# Altium PCB LL_project.PcbDoc
Units mil, origin at the board's own origin, x right, y up, seen from the top; angles counter-clockwise.
Board outline 3230 x 2460 mil, 2 copper layers (Top Layer, Bottom Layer); 62 components, 51 nets, 225 pads, 101 vias.
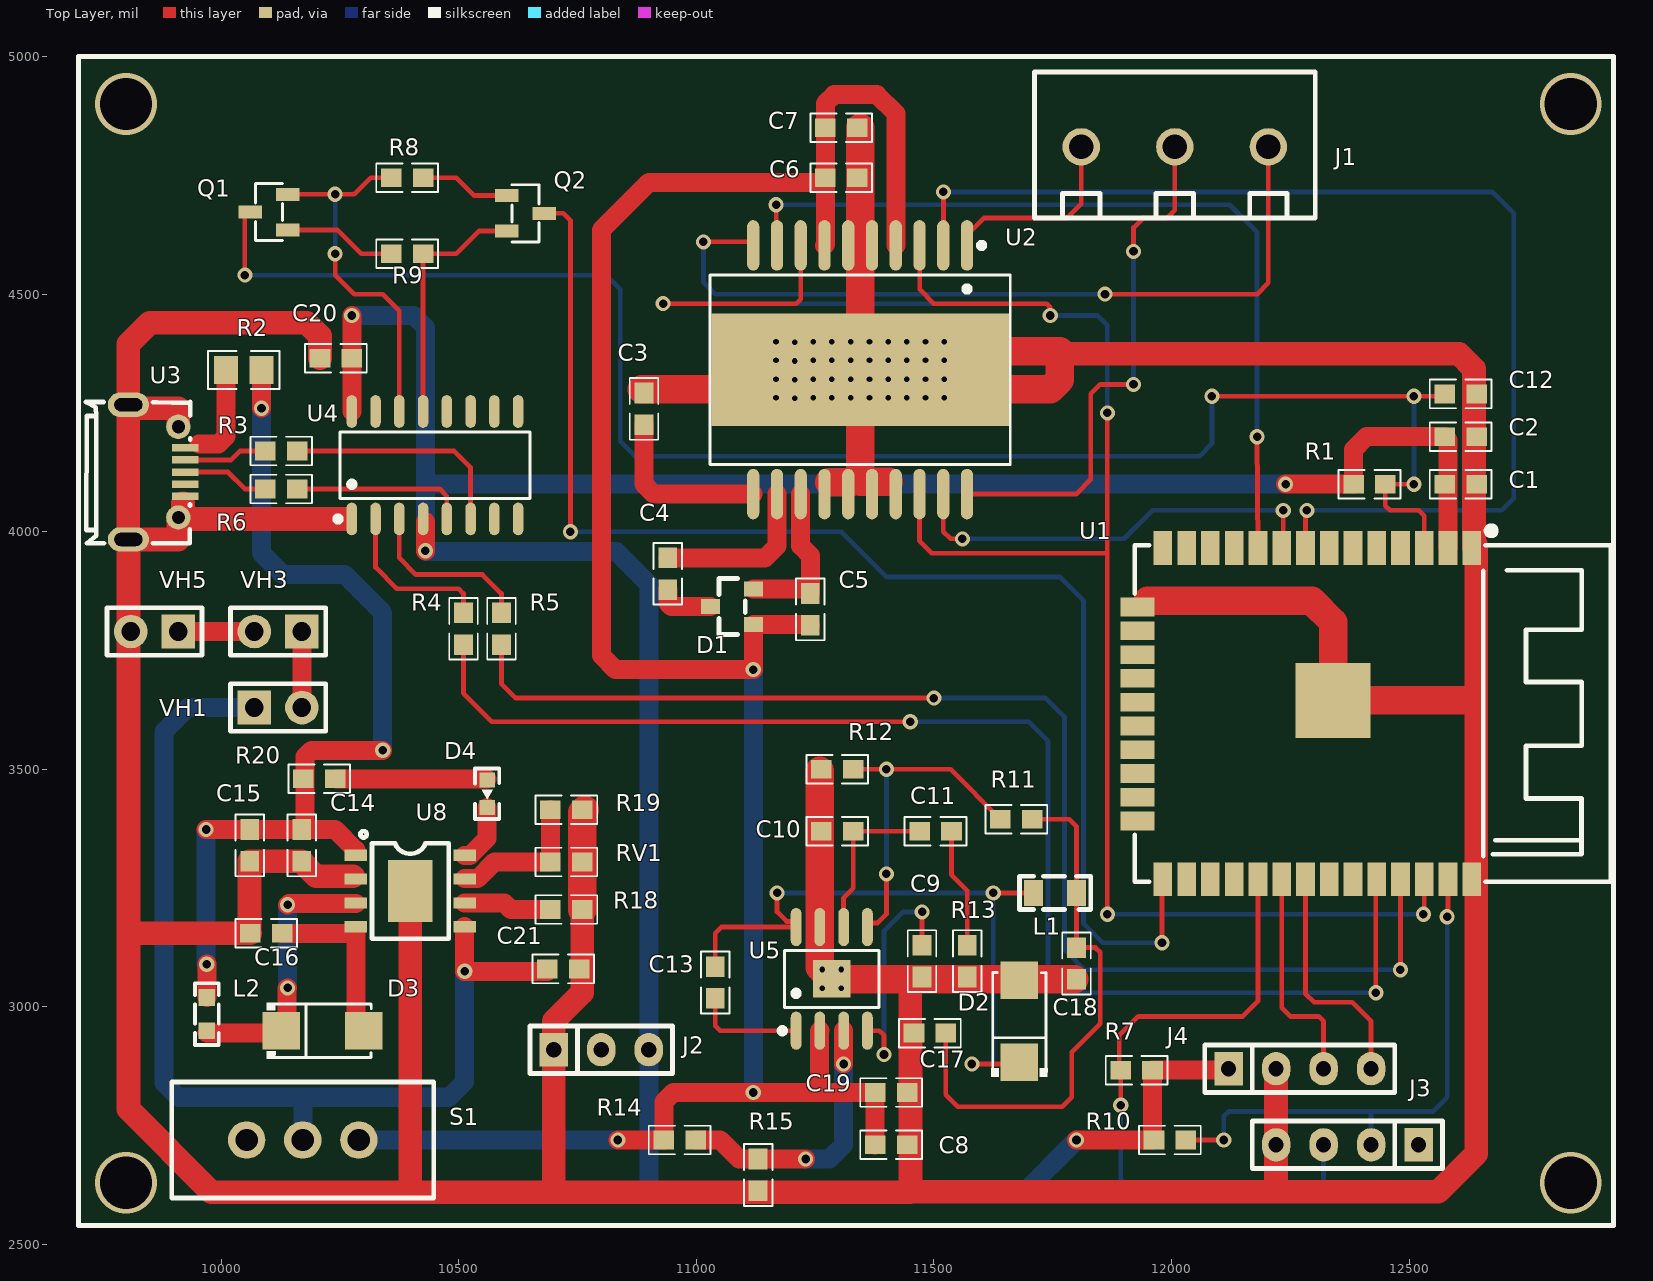
[diagram p0: Top Layer view]
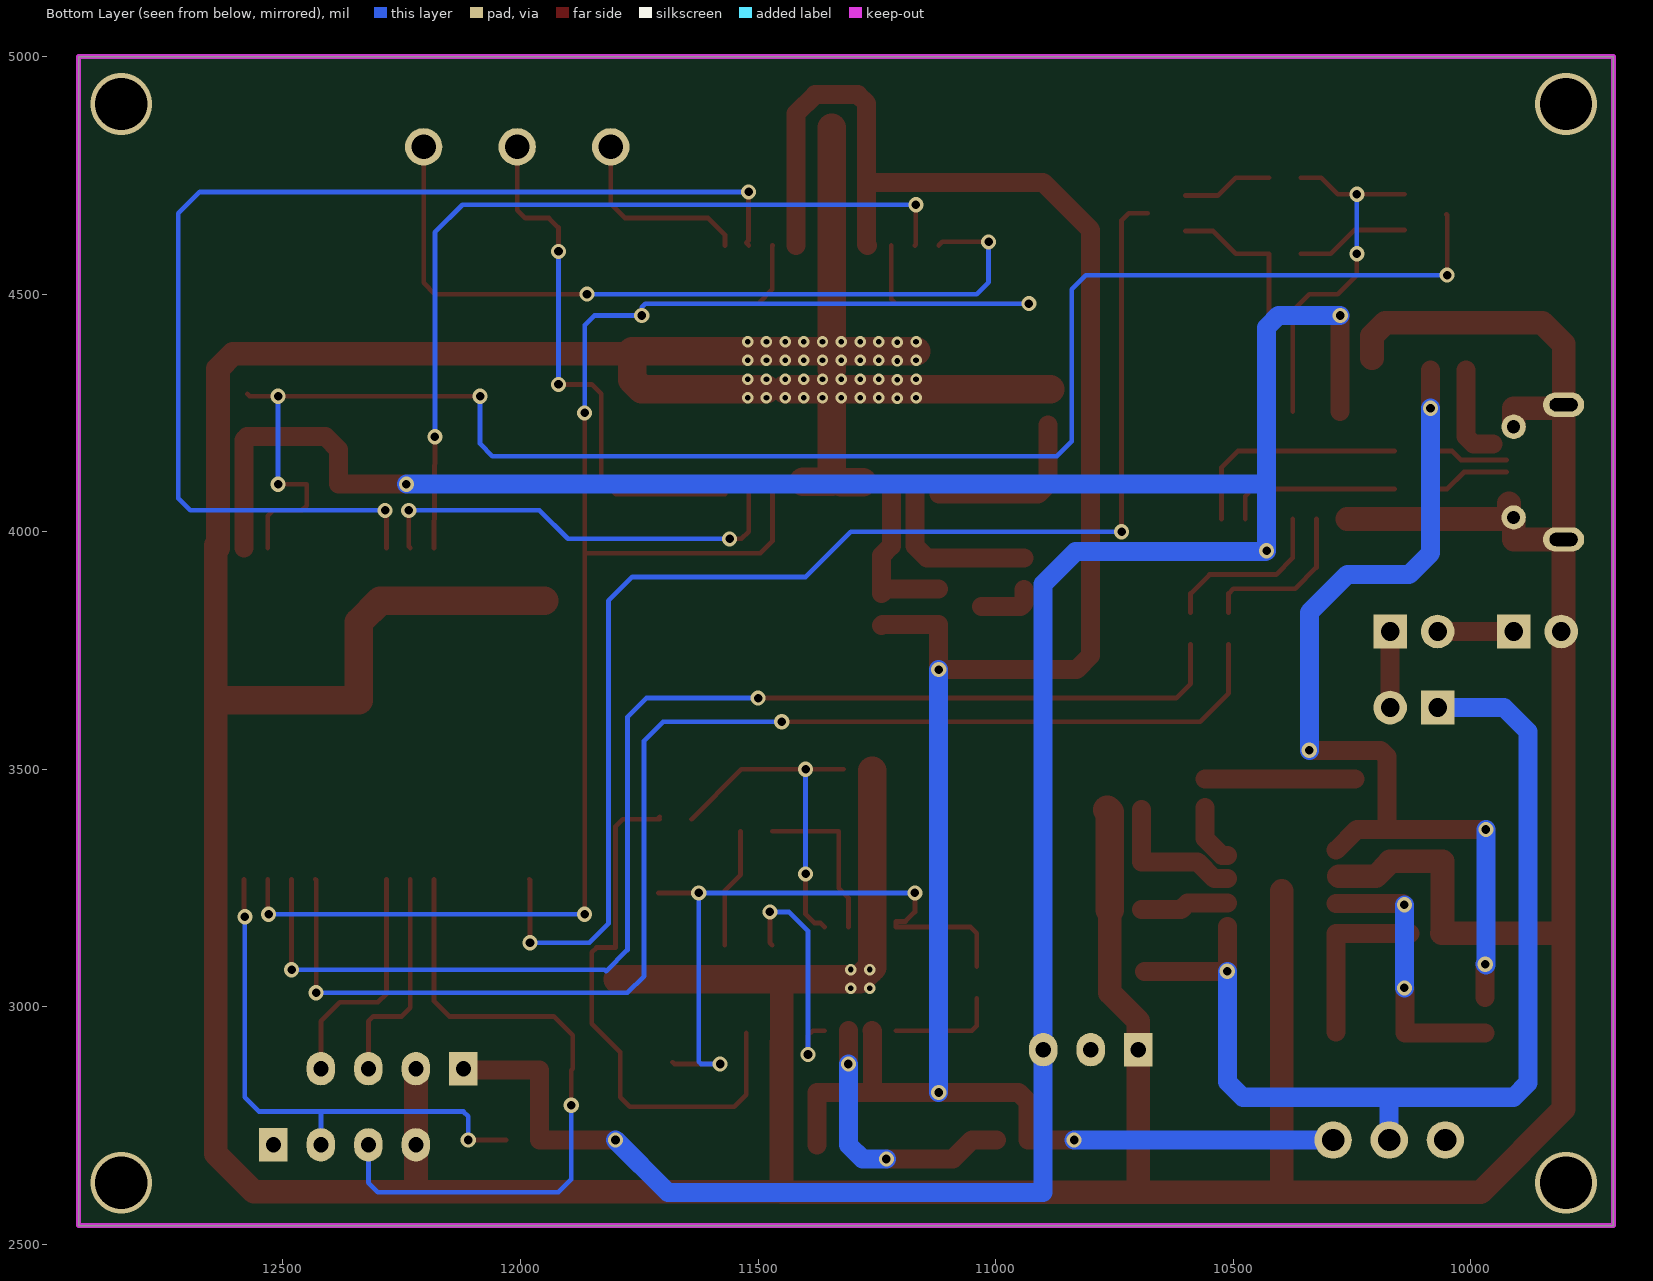
[diagram p1: Bottom Layer view, seen from below]

## Layer stack, top to bottom
Top Solder: solder mask 0.4, Solder Resist, Dk 3.5
Top Layer: signal copper 1.4
Dielectric 1: dielectric 12.6, FR-4, Dk 4.8
Bottom Layer: signal copper 1.4
Bottom Solder: solder mask 0.4, Solder Resist, Dk 3.5

## Board outline
9700,2540 9700,5000 12930,5000 12930,2540

## Design rules (kind name [scope] priority, off if disabled: settings)
AcuteAngle [All] p1: minimum=9.00000000000000E+0001 checktracksonly=FALSE
Clearance [All] p1: gap=6 ignorepadtopadclearanceinfootprint=FALSE
HoleSize [All] p1: absolutevalues=TRUE maxlimit=200 minlimit=1 maxpercent=80.000 minpercent=20.000
PolygonConnect [All] p1: connectstyle=Relief reliefconductorwidth=10 reliefentries=4 polygonreliefangle="90 Angle" airgapwidth=10
RoutingVias [All] p1: holewidth=28 width=50 viastyle="Through Hole" minholewidth=18 minwidth=30 maxholewidth=28 maxwidth=50
SilkToSilkClearance [All] p1: silktosilkclearance=6
SolderMaskExpansion [All] p1: expansion=4
Width [All] p1: maxlimit=100 minlimit=6 preferedwidth=10
28 further rules are at their usual default settings.

## Components (designator, comment, footprint, x,y, rotation, side; value= is the part's Value field where it differs from the comment)
C1 "Cap Semi" 0603-1 12608.46,4100 r0 top value=0.1uF
C2 "Cap Semi" 0603-1 12608.46,4200 r0 top value=0.1uF
C3 "Cap Semi" 0603-1 10890,4258.46 r270 top value=220nF
C4 "Cap Semi" 0603-1 10940,3911.54 r90 top value=10nF
C5 "Cap Semi" 0603-1 11240,3836.54 r90 top value=1uF
C6 "Cap Semi" 0603-1 11305,4745 r0 top value=100uF
C7 "Cap Semi" 0603-1 11305,4850 r0 top value=100nF
C8 "CAP" 0603-1 11410,2710 r0 top
C9 "CAP" 0603-1 11475,3096.54 r90 top
C10 "CAP" 0603-1 11296.54,3370 r0 top
C11 "CAP" 0603-1 11503.46,3370 r180 top
C12 "Cap Semi" 0603-1 12608.46,4290 r180 top value=0.1uF
C13 "Cap Semi" 0603-1 11040,3051.54 r90 top value=100pF
C14 "Cap Semi" 0603-1 10170,3340 r90 top value=1uF
C15 "Cap Semi" 0603-1 10060,3340 r90 top value=10uF
C16 "Cap Semi" 0603-1 10095,3155 r0 top value=22uF
C17 "CAP" 0603-1 11491.54,2945 r0 top
C18 "CAP" 0603-1 11800,3091.54 r90 top
C19 "Cap Semi" 0603-1 11410,2820 r0 top value=10nF
C20 "Cap Semi" 0603-1 10241.54,4365 r180 top value=0.1u
C21 "Cap Semi" 0603-1 10720,3080 r180 top value=100uF
D1 "LBAT54SLT1G" schottky 11075.28,3842.6 r0 top
D2 "SS36_C16015" SMA_L4.3-W2.6-LS5.2-RD 11680,2970 r90 top
D3 "SS34_C3032484" SMA_L4.3-W2.6-LS5.2-RD 10213.39,2950 r0 top
D4 "LED2" LED_0603_R 10560,3448.74 r90 top
J1 "WJ126V-5.0-3P" CONN-TH_3P-P5.00_WJ126V-5.0-3P 12006.9,4810 r180 top
J2 "Pin HDR1X3" "Pin HDR1X3/2.54mm-S" 10700,2910 r90 top
J3 "Pin HDR1X4" "Pin HDR1X4/2.54mm-S" 12520,2710 r270 top
J4 "Pin HDR1X4" "Pin HDR1X4/2.54mm-S" 12120,2870 r90 top
L1 "Inductor" 0805L 11705,3240 r0 top value=6.8uH
L2 "INDUCTOR" 0603L 9970,3020 r270 top
Q1 "S8050" Q1 9486.65,4957.51 r0 top
Q2 "S8050" Q1 11254.61,4385.09 r180 top
R1 "Res1" 0603-1 12416.54,4100 r180 top value=10K
R2 "Res3" 0805-1 10047.6,4340 r180 top value=12K
R3 "Res3" 0603-1 10126.54,4170 r180 top value=22R
R4 "Res3" 0603-1 10510,3795.94 r90 top value=100R
R5 "Res3" 0603-1 10590,3795.94 r90 top value=100R
R6 "Res3" 0603-1 10126.54,4090 r180 top value=22R
R7 "RES" 0603-1 11926.54,2866.93 r0 top
R8 "Res3" 0603-1 10391.54,4745 r180 top value=10K
R9 "Res3" 0603-1 10391.54,4585 r0 top value=10K
R10 "RES" 0603-1 11996.54,2720 r180 top
R11 "RES" 0603-1 11673.46,3395 r0 top
R12 "RES" 0603-1 11296.54,3500 r0 top
R13 "RES" 0603-1 11570,3096.54 r90 top
R14 "RES" 0603-1 10965,2720 r0 top
R15 "RES" 0603-1 11130,2646.54 r270 top
R18 "RES" 0603-1 10726.54,3205 r180 top
R19 "RES" 0603-1 10726.54,3415 r180 top
R20 "RES" 0603-1 10206.54,3480 r180 top
RV1 "Varistor" 0603-1 10726.54,3305 r0 top
S1 "SS-12D10" SS-12D10 10290,2720 r180 top
U1 "ESP-WROOM-32" ESP32 12818.14,3809.95 r270 top
U2 "L6234PD013TR" L6234 11355,4311.2 r180 top
U3 "MICRO USB" MICRO-USB-SMD_MICROXNJ 9864.78,4125.47 r270 top
U4 "CH340C" SOP-16_L10.0-W3.9-P1.27-LS6.0-BL 10450,4140 r0 top
U5 "TPS54331DDAR" SOIC-8_L5.0-W4.0-P1.27-LS6.0-BL-EP2.0 11285,3059 r0 top
U8 "CS5095" cs5095 10390,3230 r270 top
VH1 "VH2" VH 10120,3630 r0 top
VH3 "VH4" VH 10120,3790 r180 top
VH5 "VH6" VH 9860,3790 r180 top

## Footprints (in the part's own frame and the unit in brackets; to place one, negate y for a bottom-side part, rotate by r counter-clockwise, add the part's x,y. Pads: shape width x height; smd on the part's side, far side on the other; paste and mask are expansions set on the pad)
0603-1 [mm] "贴片带丝印"
  rect 1.1x1 smd: 1(-0.85,0) 2(0.85,0)
  silkscreen extent -1.65,-0.76 1.65,0.76, body extent -1.14,-0.38 1.14,0.38, height 1
0603L [mil] "小功率贴片电感"
  rect 35x35 smd: 1(0,0) 2(70,0)
  silkscreen extent -30,-25 100,25, body extent 4,-16 66,15, height 31
0805-1 [mm] "贴片带丝印"
  rect 1.3x1.5 smd: 1(-0.95,0) 2(0.95,0)
  silkscreen extent -1.91,-1.02 1.91,1.02, body extent -1.14,-0.51 1.14,0.51, height 1
0805L [mil] "小功率贴片电感"
  rect 40x55 smd: 1(5,0) 2(95,0)
  silkscreen extent -25,-35 125,35, body extent 15,-24 94,24, height 35
CONN-TH_3P-P5.00_WJ126V-5.0-3P [mil]
  round 78.7 hole 51.2 mask+2: 1(196.9,0) 2(0,0) 3(-196.8,0)
  silkscreen extent -295,-158 295,150
cs5095 [mm]
  rect 0.6x1.2 smd mask+0.051: 1(-2.261,-2.702) 2(-0.991,-2.702) 3(0.279,-2.702) 4(1.549,-2.702) 5(1.549,3.115) 6(0.279,3.115) 7(-0.991,3.115) 8(-2.261,3.115)
  rect 3.3x2.4 smd mask+0.051: 9(-0.356,0.206)
  silkscreen extent -3.56,-2.46 2.19,2.26
ESP32 [mm]
  rect 1.8x1.001 smd mask+0.051: 1(-3.961,-4.734) 2(-3.961,-6.004) 3(-3.961,-7.274) 4(-3.961,-8.544) 5(-3.961,-9.814) 6(-3.961,-11.084) 7(-3.961,-12.354) 8(-3.961,-13.624) 9(-3.961,-14.894) 10(-3.961,-16.164) 11(-3.961,-17.434) 12(-3.961,-18.704) 13(-3.961,-19.974) 14(-3.961,-21.244) 25(13.741,-21.244) 26(13.741,-19.974) 27(13.741,-18.704) 28(13.741,-17.434) 29(13.741,-16.164) 30(13.741,-14.894) 31(13.741,-13.624) 32(13.741,-12.354) 33(13.741,-11.084) 34(13.741,-9.814) 35(13.741,-8.544) 36(13.741,-7.274) 37(13.741,-6.004) 38(13.741,-4.734)
  rect 1.001x1.8 smd mask+0.051: 15(-0.8,-22.595) 16(0.47,-22.595) 17(1.74,-22.595) 18(3.01,-22.595) 19(4.28,-22.595) 20(5.55,-22.595) 21(6.82,-22.595) 22(8.09,-22.595) 23(9.36,-22.595) 24(10.63,-22.595)
  rect 4x4 smd mask+0.051: 39(4.19,-12.145)
  silkscreen extent -5.08,-22.74 13.88,2.76
L6234 [mil]
  oval 25.6x106.1 smd mask+2: 1(-214.7,-291.4) 2(-164.7,-291.4) 3(-114.7,-291.4) 4(-64.7,-291.4) 5(-14.7,-291.4) 6(35.3,-291.4) 7(85.3,-291.4) 8(135.3,-291.4) 9(185.3,-291.4) 10(235.3,-291.4) 11(235.3,232) 12(185.3,232) 13(135.3,232) 14(85.3,232) 15(35.3,232) 16(-14.7,232) 17(-64.7,232) 18(-114.7,232) 19(-164.7,232) 20(-214.7,232)
  rect 626x236.2 smd mask+2: 21(10.3,-29.7)
  silkscreen extent -306,-297 326,170
LED_0603_R [mm]
  rect 0.8x0.85 smd: 1(0.73,0) 2(-0.73,0)
  silkscreen extent -1.35,-0.65 1.35,0.65, body extent -0.81,-0.4 0.81,0.4, height 0.6
MICRO-USB-SMD_MICROXNJ [mm]
  rect 0.4x1.4 smd mask+0.051: 1(-1.3,1.521) 2(-0.65,1.521) 3(0,1.521) 4(0.65,1.521) 5(1.3,1.521)
  round 1.3 hole 0.7 mask+0.051: 6(2.425,1.149) 9(-2.425,1.149)
  oval 1.3x2.2 hole 0.7 slot 1.5 at 90 deg mask+0.051: 7(3.6,-1.521) 8(-3.6,-1.521)
  silkscreen extent -3.76,-3.78 3.8,1.79
"Pin HDR1X3/2.54mm-S" [mil]
  rect 70x60 hole 32: 1(0,0)
  oval 70x60 hole 32: 2(0,-100) 3(0,-200)
  silkscreen extent -50,-250 50,50, body extent -50,-250 50,50, height 336
"Pin HDR1X4/2.54mm-S" [mil]
  rect 70x60 hole 32: 1(0,0)
  oval 70x60 hole 32: 2(0,-100) 3(0,-200) 4(0,-300)
  silkscreen extent -50,-350 50,50, body extent -50,-350 50,50, height 336
Q1 [mm]
  rect 1.25x0.7 smd mask+0.051: 1(16.595,-8.187) 2(16.595,-6.287) 3(14.595,-7.237)
  silkscreen extent 14.87,-8.76 16.32,-5.71
schottky [mm]
  rect 1x0.8 smd mask+0.051: 1(1.15,-0.95) 2(1.15,0.95) 3(-1.15,0)
  silkscreen extent -0.7,-1.5 0.7,1.5
SMA_L4.3-W2.6-LS5.2-RD [mm]
  rect 2x2 smd mask+0.051: 1(-2.2,0) 2(2.2,0)
  silkscreen extent -2.98,-1.5 2.6,1.5
SOIC-8_L5.0-W4.0-P1.27-LS6.0-BL-EP2.0 [mil]
  oval 22.6x80.2 smd mask+2: 1(-75,-109) 2(-25,-109) 3(25,-109) 4(75,-109) 5(75,109) 6(25,109) 7(-25,109) 8(-75,109)
  rect 78.7x78.7 smd mask+2: 9(0,0)
  silkscreen extent -110,-115 100,60
SOP-16_L10.0-W3.9-P1.27-LS6.0-BL [mm]
  oval 0.56x1.745 smd mask+0.051: 1(-4.445,-2.872) 2(-3.175,-2.872) 3(-1.905,-2.872) 4(-0.635,-2.872) 5(0.635,-2.872) 6(1.905,-2.872) 7(3.175,-2.872) 8(4.445,-2.872) 9(4.445,2.872) 10(3.175,2.872) 11(1.905,2.872) 12(0.635,2.872) 13(-0.635,2.872) 14(-1.905,2.872) 15(-3.175,2.872) 16(-4.445,2.872)
  silkscreen extent -5.33,-3.02 5.08,1.77
SS-12D10 [mm]
  round 2 hole 1.2: 1(0,0) 2(3,0) 3(6,0)
  silkscreen extent -4,-3.1 10,3.1, body extent -3.95,-3.15 10.05,3.05, height 9.65
VH [mm]
  rect 1.8x1.8 hole 1 mask+0.051: 1(-1.27,0)
  round 1.8 hole 1 mask+0.051: 2(1.27,0)
  silkscreen extent -2.54,-1.27 2.54,1.27

## Part data
C1 C2 C3 C4 C5 C6 C7 C12 C13 C14 C15 C16 C19 C20 C21: "Capacitor (Semiconductor SIM Model)", LatestRevisionDate=29-May-2009, LatestRevisionNote="IPC-7351 Footprint Added.", PackageDescription="Chip Capacitor", PackageReference=C1206, Published=8-Jun-2000, Publisher="Altium Limited"
C8 C9 C10 C11 C17 C18: "无极性电容"
  C8 C18: =47uF
  C9: =10nF
  C10: =47pF
  C11: =1000pF
  C17: =47upF
D1: Average Rectified Current (Io)=200mA, Forward Voltage (Vf@If)=320mV@1mA, JLCPCB Part Class="Extended Part", LCSC Part Name="30V 200mA 320mV@1mA", Manufacturer=LRC(乐山无线电), Reverse Voltage (Vr)=30V, Add into BOM=yes, Convert to PCB=yes, Datasheet=https://atta.szlcsc.com/upload/public/pdf/source/20130604/1457706606553.pdf, Device=LBAT54SLT1G, Manufacturer Part=LBAT54SLT1G, Name=LBAT54SLT1G, Supplier=LCSC, Supplier Footprint=SOT-23(SOT-23-3), Supplier Part=C12765, Symbol=LBAT54SLT1G
D2: Average Rectified Current (Io)=3A, Forward Voltage (Vf@If)=700mV@3A, JLCPCB Part Class="Extended Part", LCSC Part Name="60V 3A 700mV@3A", Manufacturer=MDD, Manufacturer Part=SS36, Reverse Voltage (Vr)=60V, Add into BOM=yes, Convert to PCB=yes, Datasheet=https://atta.szlcsc.com/upload/public/pdf/source/20210506/C15874_5BDBC70F665BA444FCE0210303DB2A89.pdf, Device=SS36_C16015, Name=SS36, Supplier=LCSC, Supplier Footprint=SMA(DO-214AC), Supplier Part=C16015, Symbol=SS36
D3: JLCPCB Part Class="Extended Part", LCSC Part Name=SS34, Manufacturer=TDD(台冠电子), Add into BOM=yes, Convert to PCB=yes, Datasheet=https://atta.szlcsc.com/upload/public/pdf/source/20220622/9D70D0693761B542BF6F533590093AA5.pdf, Device=SS34_C3032484, Manufacturer Part=SS34, Name=SS34, Supplier=LCSC, Supplier Footprint=SMA, Supplier Part=C3032484, Symbol=SS34_C3032484
D4: "Typical RED, GREEN, YELLOW, AMBER GaAs LED", LatestRevisionDate=17-Jul-2002, LatestRevisionNote="Re-released for DXP Platform.", PackageDescription="SM LED; 2 Flat Leads", PackageReference=3.2X1.6X1.1, PackageVersion=Feb-2002, Published=8-Jun-2000, Publisher="Altium Limited"
J1: Color=绿色, Current Rating (Max)=18A, JLCPCB Part Class="Extended Part", LCSC Part Name="5mm 排数:1 每排P数:3 直针 可拼接", Manufacturer=KANGNEX(康奈克斯电气), Operating Temperature Range=-40℃~+105℃, Voltage Rating (Max)=250V, Add into BOM=yes, Convert to PCB=yes, Datasheet=https://atta.szlcsc.com/upload/public/pdf/source/20191225/C8401_BC4AEF85CCBF7CDF5CCE64583ADD1E63.pdf, Device=WJ126V-5.0-3P, Manufacturer Part=WJ126V-5.0-3P, Mounting Sytle=直针, Name=WJ126V-5.0-3P, Number of PINs Per Row=3, Number of Rows=1, Pitch=5mm, Supplier=LCSC, Supplier Footprint=P=5mm, Supplier Part=C8401, Symbol=WJ126V-5.0-3P, Wire Gauge - AWG=14~26, Wire Gauge - mm?=2.5
Q1 Q2: JLCPCB Part Class="Extended Part", Manufacturer=Doeshare(德芯), Add into BOM=yes, Convert to PCB=yes, Datasheet=https://atta.szlcsc.com/upload/public/pdf/source/20220117/E6D3315E0D6ADDB25840BFFAC039C5C0.pdf, Device=S8050, LCSC Part Name=S8050, Manufacturer Part=S8050, Name=S8050, Supplier=LCSC, Supplier Footprint=SOT-23, Supplier Part=C2931719, Symbol=S8050_C2931719
R1 R2 R3 R4 R5 R6 R8 R9: "Resistor", Published=8-Jun-2000, Publisher="Altium Limited"
  R1: LatestRevisionDate=17-Jul-2002, LatestRevisionNote="Re-released for DXP Platform.", PackageDescription="Axial Device, Thru-Hole; 2 Leads; 0.3 in Pin Spacing", PackageReference=AXIAL-0.3
  R2 R3 R4 R5 R6 R8 R9: LatestRevisionDate=29-May-2009, LatestRevisionNote="IPC-7351 Footprint Added.", PackageDescription="Chip Resistor", PackageReference=J1-0603
RV1: "压敏电阻", =100K
VH3 VH5: library part VH2
L1: Code_IEC=1005, Code_JEITA=0402, LatestRevisionDate=29-May-2009, LatestRevisionNote="IPC-7351 Footprint Added.", PackageDescription="Chip Inductor", PackageReference=0402-A, Published=8-Jun-2000, Publisher="Altium Limited"
L2: =2.2uH
R7 R10: =5K
R11: =10.2K
R12: =3.24K
R13: =24.9K
R14: =332K
R15: =68.1K
R18: =10K
R19: =82K
R20: =1K

## Via types
v1: diameter 32, hole 18, Top Layer to Bottom Layer, tented both sides, 52 vias
v2: diameter 24, hole 12, Top Layer to Bottom Layer, tented both sides, 44 vias
v3: diameter 130, hole 110, Top Layer to Bottom Layer, 4 vias
v4: diameter 32, hole 18, Top Layer to Bottom Layer, 1 vias

## Nets (pads, with @x,y where several pads share a name; then routed paths per layer and width w, separated by ;. In a path a pad name is that pad's centre, name@x,y a point inside that pad or via, vN(x,y) a via of type N, cw(c..) or ccw(c..) an arc to the next point about the centre after c; other vN are vias at no path point)
5VIN: C14.2 C15.2 L2.1 R2.1 R20.2 U8.1 | length 1987.7
  Top Layer w40: v1(9968.46,3373.46) C15.2 C14.2 10240.17,3373.46 U8.1@10283.62,3330.01 ; L2.1 v1(9970,3090) ; v1(10085,4260) R2.1 ; C14.2@10176.54,3380 10176.54,3526.54 10190,3540 v1(10340,3540)
  Bottom Layer w40: v1(9968.46,3373.46) 9968.46,3088.46 v1(9970,3090) ; v1(10085,4260) 10085,3955 10130,3910 10260,3910 10340,3830 v1(10340,3540)
+3.3V: C1.1 C2.1 C20.1 J2.3 J4.1 R1.2 R7.2 R10.2 U1.2 U4.4 U4.16 | length 6558.1
  Top Layer w40: U4.16 C20.1 v1(10275,4455) ; v1(10430,3960) U4.4@10430,4021.91 ; v1(11800,2720) 11960,2720 R7.2 12116.93,2866.93 J4.1 ; v1(12240,4100) R1.2 12383.07,4173.07 12410,4200 C2.1 12581.76,4193.24 U1.2
  Bottom Layer w40: v1(10275,4455) 10405,4455 10430,4430 10430,4100 ; v1(11800,2720) 11690,2610 10900,2610 J2.3 10900,3890 10832,3958 10432,3958 v1(10430,3960) 10430,4100 ; v1(12240,4100) 10430,4100
BatVin: C5.1 C6.1 C7.1 C8.1 C19.1 D1.1 R14.1 S1.1 U2.4 U2.7 U5.2 | length 5015.6
  Top Layer w40: v1(10835,2720) R14.1 10931.54,2800 10951.54,2820 v1(11120,2820) 11260,2820 ; C5.1 11237.87,3805.2 D1.1 11120,3804.64 v1(11120,3710) 10830,3710 10800,3740 10800,4635 10900,4735 11261.54,4735 C6.1 ; U5.2 11259,2949 11259,2821 11260,2820 ; U2.7 11271.54,4604.44 C6.1 ; C8.1 C19.1 11260,2820 ; U2.4 11419.7,4880.3 11380,4920 11290,4920 11271.54,4901.54 C7.1 C6.1
  Bottom Layer w40: S1.1 v1(10835,2720) ; v1(11120,2820) v1(11120,3710)
D+: R6.1 U4.5 | length 369.3
  Top Layer w10: R6.1 10460,4090 10475,4075 U4.5
D-: R3.1 U4.6 | length 487.6
  Top Layer w10: R3.1 10490,4170 10525,4135 U4.6
DTR: Q2.2 R9.2 U4.13 | length 527.9
  Top Layer w10: U4.13 R9.2 10495,4585 10542.6,4632.6 Q2.2
EN: C12.2 Q1.3 R1.1 U1.3 | length 3559.4
  Top Layer w10: v1(10050,4540) 10050,4666.34 Q1.3@10051.26,4667.6 ; v1(12085,4285) v1(12510,4285) 12570,4285 C12.2 ; v1(12510,4100) R1.1 12450,4055 12460,4045 12520,4045 12531.76,4033.24 U1.3
  Bottom Layer w10: v1(10050,4540) 10810,4540 10840,4510 10840,4190 10871,4159 12059,4159 12085,4185 v1(12085,4285) ; v1(12510,4100) v1(12510,4285)
GND: C1.2 C2.2 C3.1 C6.2 C7.2 C8.2 C9.1 C10.1 C12.1 C14.1 C15.1 C16.1 C17.1 C18.1 C19.2 C20.2 C21.1 D2.2 J2.1 J3.4 J4.2 R12.1 R13.1 R15.2 R18.1 R19.1 RV1.2 U1.1 U1.15 U1.38 U1.39 U2.5 U2.6 U2.14 U2.15 U2.16 U2.17 U2.21 U3.5 U3.6 U3.7 U3.8 U3.9 U4.1 U5.7 U5.9 U8.2 U8.9 VH5.2 | length 15096.2
  Top Layer w50: U3.8 9804.88,4394.88 9850,4440 10180,4440 10208.07,4411.93 C20.2 ; U3.6 9920,4040 9920,4060 ; U3.9 9910,4260 9804.88,4260 U3.7 ; U3.6@9910.87,4027.18 9910,4027.18 U3.6@9910,4026.91 ; C16.1 C16.1@10060,3155 ; C14.1@10170,3305 10200,3275 U8.2@10277.63,3275 ; C14.1 C15.1 C16.1@10060,3155 ; 10260,4026.91 U3.6@9910,4026.91 ; 10398.12,2618.12 U8.9 ; R18.1 10760,3030 10700,2970 J2.1 10700,2610 ; 11450,2610 10700,2610 ; C17.1@11450,2926.27 11450,3030 ; 11451,2925.27 11451,2820 11451,2611 12220,2611 ; 11765,4374.56 12605,4374.56 12636.76,4342.81 12636.76,4100 U1.1@12636.76,3965.88 ; J4.2 J3.4 12220,2611 ; U1.1@12637.46,3975 12641,3971.46 12641,2691 12561,2611 12220,2611 ; 9804.88,3160 U3.7 ; 9804.88,3160 9804.88,2785.12 9980,2610 10700,2610 ; 9804.88,3160 9809.88,3155 C16.1@10060,3155 ; U3.7 9910,3983.74 U3.6@9910,4026.91
  Top Layer w60: R18.1 10760,3410 R19.1@10765,3415 ; C3.1@10885,4300 11325,4300 11344.7,4300 11344.7,4105.3 11404.7,4105.3 ; U2.21@11167.5,4380 11246.3,4380 U2.21@11325,4380 ; R12.1@11260,3496.93 U5.7 11260,3084 v2(11265.3,3078.7) U5.9 11285.93,3058.07 11475,3058.07 C18.1@11795,3058.07 ; U2.14@11280,4104.2 U2.15@11324.7,4104.2 ; U2.21 C7.2@11344.7,4849.7 ; U2.21@11364.4,4300 U2.21@11443.1,4300 ; U2.21@11364.4,4380 U2.21@11403.7,4380 ; U2.21@11403.8,4380 11482.5,4380 11765,4380 ; U2.21@11482.5,4300 11745,4300 11765,4320 11765,4374.56 ; U1.15@11950,3855 12295,3855 12340,3810 U1.39 12630,3645
  other v2: 11265.3,3039.3 11304.7,3039.3 11304.7,3078.7 11206.9,4280.7 11167.5,4281.8 11246.3,4281.8 11285,4281.8 11325,4281.8 11364.4,4281.8 11403.7,4281.8 11443.1,4281.8 11482.5,4281.8 11521.9,4281.8 11206.9,4320 11167.5,4321.2 11246.3,4321.2 11285,4321.2 11325,4321.2 11364.4,4321.2 11403.7,4321.2 11443.1,4321.2 11482.5,4321.2 11521.9,4321.2 11206.9,4359.4 11167.5,4360.6 11246.3,4360.6 11285,4360.6 11325,4360.6 11364.4,4360.6 11403.7,4360.6 11443.1,4360.6 11482.5,4360.6 11521.9,4360.6 11206.9,4398.8 11167.5,4400 11246.3,4400 11285,4400 11325,4400 11364.4,4400 11403.8,4400 11443.1,4400 11482.5,4400 11521.9,4400
GPIO0: Q2.3 U1.25 | length 2852.6
  Top Layer w10: Q2.3 10720,4670 10735,4655 v1(10735,4000) ; v4(11980,3135) 11980,3267.23 U1.25
  Bottom Layer w10: v1(10735,4000) 11305,4000 11400,3905 11765,3905 11815,3855 11815,3175 11855,3135 v4(11980,3135)
M0_EN: U1.36 U2.3 U2.8 U2.18 | length 4255.7
  Top Layer w10: v1(10930,4480) 11210,4480 11219.7,4489.7 U2.8 ; U2.18 11469.7,3980.3 11495,3955 11865,3955 ; U2.3 11470,4602.3 11470,4510 11500,4480 11737.5,4480 11745,4472.5 v1(11745,4455) ; v1(11865,3195) 11865,3955 ; v1(11865,4250) 11865,3955 ; v1(12530,3195) 12531.76,3196.76 U1.36
  Bottom Layer w10: v1(10930,4480) 11737.5,4480 11745,4472.5 v1(11745,4455) 11845,4455 11865,4435 v1(11865,4250) ; v1(11865,3195) v1(12530,3195)
M0_IN1: U1.8 U2.2 | length 2461.1
  Top Layer w10: U2.2 11525,4607.9 11520,4612.9 v1(11520,4715) ; U1.8 12281.76,4041.76 v1(12285,4045)
  Bottom Layer w10: v1(11520,4715) 12675,4715 12720,4670 12720,4070 12695,4045 v1(12285,4045)
M0_IN2: U1.9 U2.19 | length 905.9
  Top Layer w10: U2.19 11519.7,4000.3 11535,3985 v1(11560,3985) ; U1.9 12235,3969.12 v1(12235,4045)
  Bottom Layer w10: v1(11560,3985) 11900,3985 11960,4045 v1(12235,4045)
M0_IN3: U1.10 U2.9 | length 1786.3
  Top Layer w10: v1(11168,4688) 11168,4604.3 U2.9 ; v1(12180,4200) U1.10
  Bottom Layer w10: v1(11168,4688) 12122,4688 12180,4630 v1(12180,4200)
NetC3_2: C3.2 U2.11 | length 363.3
  Top Layer w40: C3.2 10890,4100 10910.8,4079.2 U2.11
NetC4_1: C4.1 D1.3 | length 121.1
  Top Layer w40: C4.1 10940,3850 10947.4,3842.6 D1.3
NetC4_2: C4.2 U2.12 | length 349.4
  Top Layer w40: C4.2 11145,3945 11169.7,3969.7 U2.12
NetC5_2: C5.2 D1.2 U2.13 | length 341.2
  Top Layer w40: D1.2 11230,3880 C5.2 11240,3950 11219.7,3970.3 U2.13
NetC9_2: C9.2 U5.4 | length 507.8
  Top Layer w10: U5.4 11385,2950 11395,2940 v1(11395,2900) ; C9.2@11470,3130 11475,3135 v1(11475,3200)
  Bottom Layer w10: v1(11395,2900) 11395,3160 11435,3200 v1(11475,3200)
NetC10_2: C10.2 C11.2 U5.6 | length 350.3
  Top Layer w10: U5.6 11310,3230 11330,3250 C10.2 C11.2
NetC11_1: C11.1 R13.2 | length 253.7
  Top Layer w10: C11.1 11536.93,3278.07 11570,3245 R13.2
NetC13_1: C13.1 U5.1 | length 232.2
  Top Layer w10: C13.1 11040,2960 11050,2950 U5.1
NetC13_2: C13.2 D2.1 L1.1 U5.8 | length 1393.3
  Top Layer w10: C13.2 11040,3155 11053,3168 U5.8 11210,3180 11190,3180 11170,3200 v1(11170,3240) ; v1(11580,2880) 11676.61,2880 D2.1 ; v1(11625,3240) L1.1
  Bottom Layer w10: v1(11170,3240) 11615,3240 11620,3235 v1(11625,3240) 11625,2885 11620,2880 v1(11580,2880)
NetC16_2: C16.2 D3.2 U8.4 | length 362.4
  Top Layer w40: C16.2 10283.62,3155 D3.2@10283.62,2947.76
NetC21_2: C21.2 S1.2 U8.5 VH1.1 | length 2199.6
  Top Layer w40: U8.5 v1(10512.62,3075) C21.2@10686.54,3075
  Bottom Layer w40: VH1.1 9930,3630 9880,3580 9880,2840 9910,2810 10171.89,2810 ; S1.2 10171.89,2810 ; v1(10512.62,3075) 10512.62,2842.62 10480,2810 10171.89,2810
NetD3_1: D3.1 L2.2 U8.3 | length 584.4
  Top Layer w40: L2.2@9970,2945 10139.13,2945 10139.13,3039.13 v1(10140,3040) ; v1(10140,3215) 10143.01,3218.01 U8.3@10283.62,3218.01
  Bottom Layer w40: v1(10140,3040) v1(10140,3215)
NetD4_1: D4.1 R20.1 | length 316.5
  Top Layer w40: R20.1@10243.46,3480 D4.1@10560,3480
NetD4_2: D4.2 U8.8 | length 127.3
  Top Layer w40: U8.8 10524.01,3319.01 10560,3355 D4.2
NetJ1_1: J1.1 U2.1 | length 409.4
  Top Layer w10: U2.1 11569.7,4624.7 11605,4660 11780,4660 11810,4690 J1.1
NetJ1_2: J1.2 U2.20 | length 1116.6
  Top Layer w10: U2.20 11799.2,4079.2 11830,4110 11830,4290 11850,4310 v1(11920,4310) ; v1(11920,4590) 11920,4640 11940,4660 11990,4660 12006.9,4676.9 J1.2
  Bottom Layer w10: v1(11920,4310) v1(11920,4590)
NetJ1_3: J1.3 U2.10 | length 1687.9
  Top Layer w10: v1(11015,4610) 11112.3,4610 U2.10 ; v1(11860,4500) 12180,4500 12203.7,4523.7 J1.3
  Bottom Layer w10: v1(11015,4610) 11015,4525 11040,4500 v1(11860,4500)
NetQ1_1: Q1.1 R9.1 | length 238.9
  Top Layer w10: Q1.1 10244.8,4635.2 10295,4585 R9.1
NetQ2_1: Q2.1 R8.1 | length 191.8
  Top Layer w10: R8.1 10495,4745 10532.6,4707.4 Q2.1
NetR2_2: R2.2 U3.1 | length 203.1
  Top Layer w40: 9953.19,4184.93 9994.93,4184.93 10010.2,4200.2 R2.2
NetR3_2: R3.2 U3.2 | length 176.2
  Top Layer w10: U3.2 10021.06,4151.06 10040,4170 R3.2
NetR4_2: R4.2 U4.2 | length 350.3
  Top Layer w10: U4.2 10325,3925 10370,3880 10500,3880 10510,3870 R4.2
NetR5_2: R5.2 U4.3 | length 368.6
  Top Layer w10: U4.3 10375,3945 10410,3910 10550,3910 10590,3870 R5.2
NetR6_2: R6.2 U3.3 | length 183.1
  Top Layer w10: U3.3 10014.53,4125.47 10050,4090 R6.2
NetR11_1: R11.1 R12.2 U5.5 | length 719.7
  Top Layer w10: R12.2@11320,3500 R12.2 v1(11400,3500) 11535,3500 R11.1 ; U5.5 11368.75,3176.75 11381.75,3176.75 11400,3195 v1(11400,3280)
  Bottom Layer w10: v1(11400,3280) v1(11400,3500)
NetR14_2: R14.2 R15.1 U5.3 | length 580.5
  Top Layer w40: R14.2 11050,2720 11090,2680 R15.1 v1(11230,2680) ; v1(11310,2880) U5.3
  Bottom Layer w40: v1(11230,2680) 11280,2680 11310,2710 v1(11310,2880)
NetR18_2: R18.2 U8.6 | length 186.3
  Top Layer w40: U8.6 10595.99,3219.01 10610,3205 R18.2
NetR19_2: R19.2 RV1.1 U8.7 | length 304.9
  Top Layer w40: U8.7@10512.62,3270 10540.05,3270 10575.05,3305 RV1.1 R19.2
NetVH1_2: VH1.2 VH3.1 | length 160
  Top Layer w40: VH1.2 VH3.1
NetVH3_2: VH3.2 VH5.1 | length 160
  Top Layer w40: VH5.1 VH3.2
RTS: Q1.2 R8.2 U4.14 | length 780.5
  Top Layer w10: Q1.2 v1(10240,4710) 10280,4710 10315,4745 R8.2 ; v1(10240,4585) 10240,4540 10280,4500 10340,4500 10375,4465 U4.14
  Bottom Layer w10: v1(10240,4585) v1(10240,4710)
RXD0: R4.1 U1.34 | length 2813.1
  Top Layer w10: R4.1 10510,3660 10570,3600 v1(11450,3600) ; v1(12430,3030) 12430,3267.23 U1.34
  Bottom Layer w10: v1(11450,3600) 11700,3600 11740,3560 11740,3065 11775,3030 v1(12430,3030)
SCL_0: J4.3 U1.30 | length 470.7
  Top Layer w10: U1.30 12231.76,2998.24 12250,2980 12310,2980 12320,2970 J4.3
SCL_1: J3.3 R7.1 U1.29 | length 1409.4
  Top Layer w10: v1(11893.07,2793.07) R7.1 11890,2870 11890,2940 11930,2980 12150,2980 12181.76,3011.76 U1.29
  Bottom Layer w10: v1(11893.07,2793.07) 11893.07,2636.93 11920,2610 12300,2610 12320,2630 J3.3
SDA_0: J4.4 U1.31 | length 503.1
  Top Layer w10: U1.31 12281.76,3028.24 12300,3010 12380,3010 12420,2970 J4.4
SDA_1: J3.2 R10.1 U1.37 | length 1146.3
  Top Layer w10: R10.1 v1(12110,2720) ; v1(12580,3190) 12581.76,3191.76 U1.37
  Bottom Layer w10: v1(12110,2720) 12110,2770 12120,2780 12420,2780 ; J3.2 12420,2780 ; v1(12580,3190) 12580,2810 12550,2780 12420,2780
TXD0: R5.1 U1.35 | length 2704
  Top Layer w10: R5.1 10590,3680 10620,3650 v1(11500,3650) ; v1(12481.76,3078.24) U1.35
  Bottom Layer w10: v1(11500,3650) 11735,3650 11775,3610 11775,3120 11820,3075 11823.24,3078.24 v1(12481.76,3078.24)
VOUT: C17.2 C18.2 L1.2 R11.2 | length 1159
  Top Layer w10: C17.2 11525,2815 11550,2790 11770,2790 11790,2810 11790,2905 11850,2965 11850,3115 11840,3125 C18.2 L1.2 11800,3380 11785,3395 R11.2@11711.93,3395 ; R11.2 R11.2@11711.93,3395 ; R11.2@11706.93,3400 R11.2@11711.93,3395
pads on no net: J2.2 J3.1 S1.3 U1.4 U1.5 U1.6 U1.7 U1.11 U1.12 U1.13 U1.14 U1.16 U1.17 U1.18 U1.19 U1.20 U1.21 U1.22 U1.23 U1.24 U1.26 U1.27 U1.28 U1.32 U1.33 U3.4 U4.7 U4.8 U4.9 U4.10 U4.11 U4.12 U4.15
copper on no net:
  other v3: 9800,2630 12840,2630 9800,4900 12840,4900

## Keep-outs
Keep-Out Layer:
  the board outline again, w10

## Silkscreen, mask and mechanical layers (free items; w line width, h text height)
Top Overlay:
  lines w10: 9700,2540 9720,2540 12930,2540 12930,4570 12930,5000 9700,5000 9700,4910 9700,2540

## Dimensions
9700,2480 to 12930,2420 on Top Overlay
12980,5000 to 13050,2540 on Top Overlay